# EAGLE board Everson_vin-5v-regulator (EAGLE 9.6.2)
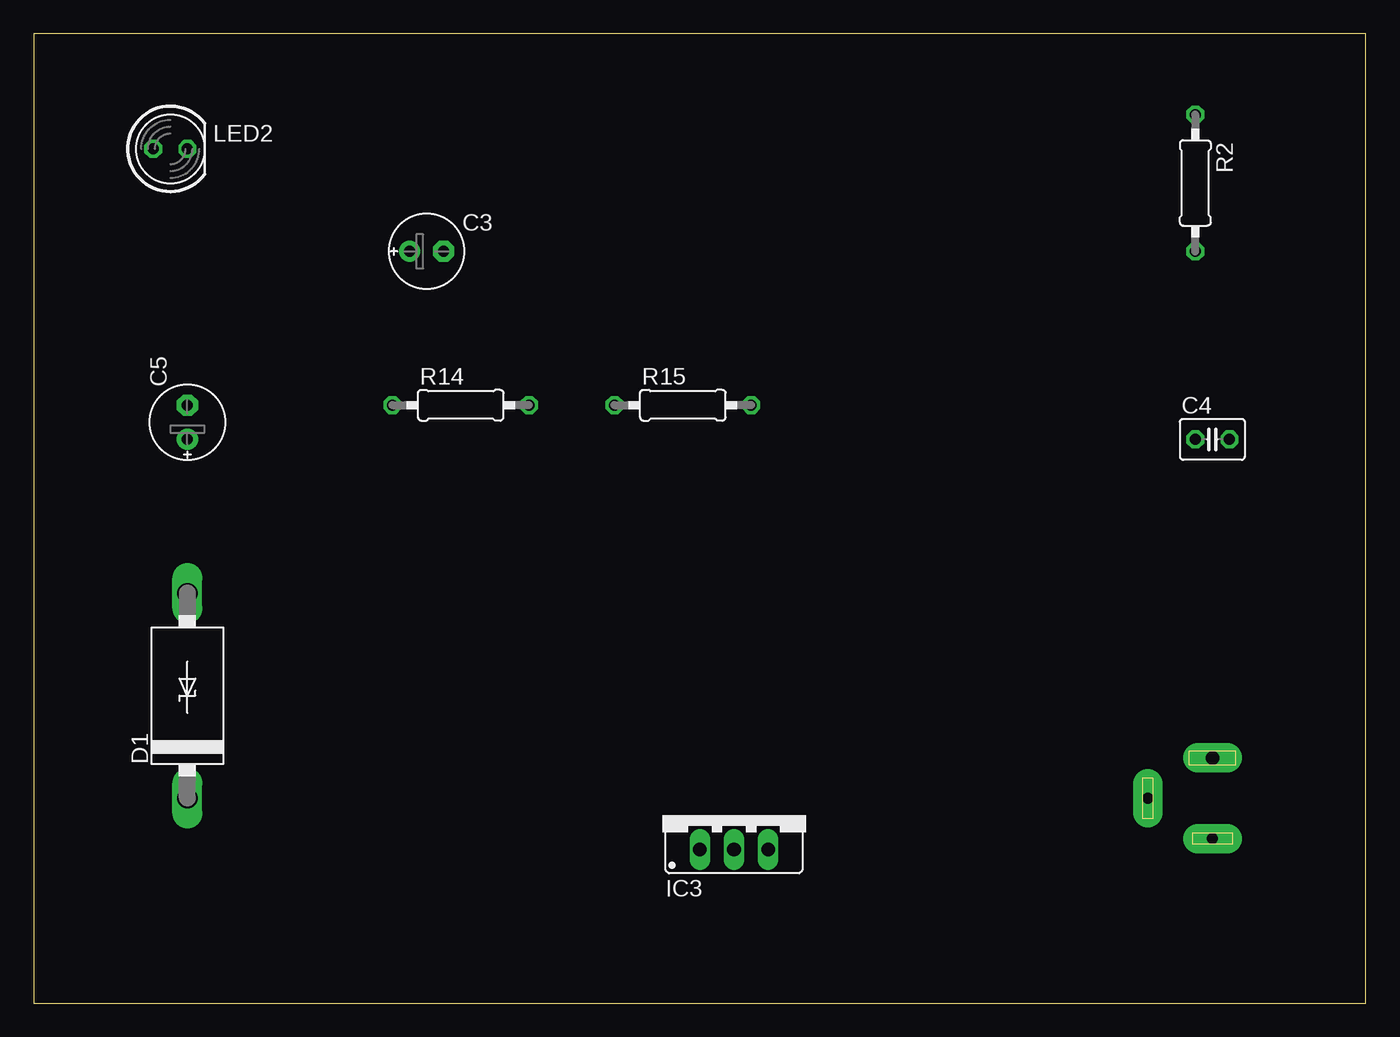
[diagram p0: board, top side]
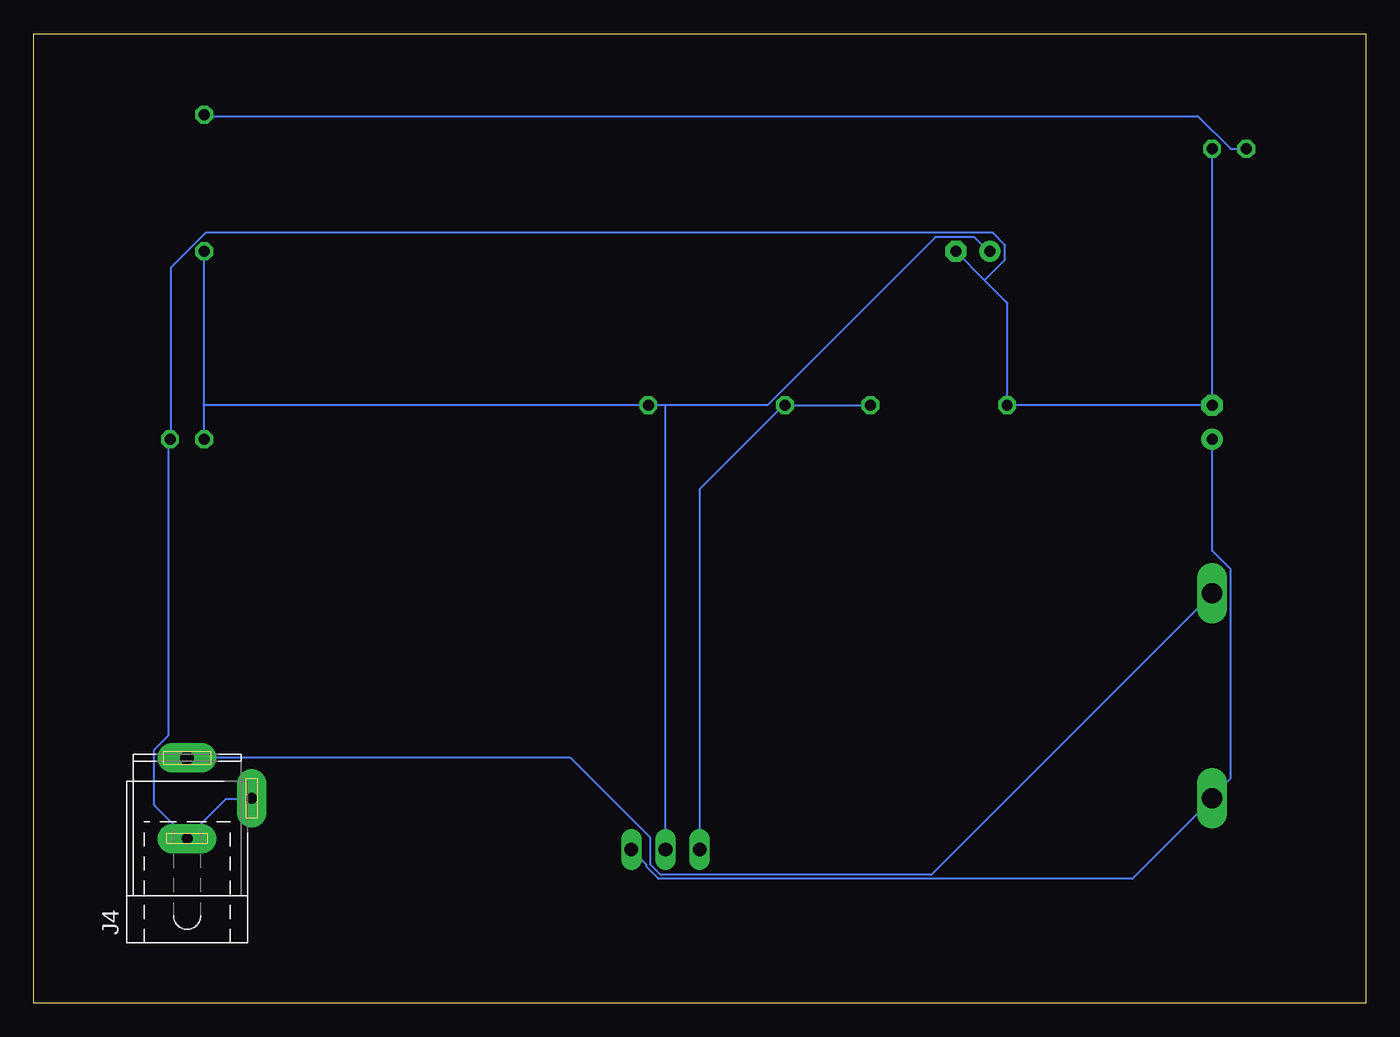
[diagram p1: board, bottom side, seen from below]

Size 99.04 x 72.06 mm. Coordinates in mm from the lower left corner, seen from the top.
Outline: 0,0 99.04,0 99.04,72.06 0,72.06 0,0
Copper layers (1*16): Top 0.035mm / dielectric 1.5mm / Bottom 0.035mm
Design rules "default": minimum track width 6mil, minimum drill 0.35mm, track to track 6mil, track to pad 6mil, pad to pad 6mil, via to via 6mil, smd to smd 6mil, copper to edge 40mil, drill to drill 6mil, minimum pad ring 10mil, minimum via ring 8mil, stop-mask expansion 4mil, vias tented up to drill 0mil, thermal gap 10mil

## Footprints (pad centres in the part's own frame; a part is rotated, then mirrored left to right if it is on the bottom)
E2,5-6E = drill 0.813 pad 1.575: + -1.27,0 | drill 0.813 pad 1.575 octagon: - 1.27,0
C025-030X050 = drill 0.813 octagon: 1 -1.27,0; 2 1.27,0
C4111-15 = drill 1.499 long: A 7.62,0; C -7.62,0
317TS = drill 1.016 long: 1 -2.54,-2.54; 2 0,-2.54; 3 2.54,-2.54
SPC4077 = drill 0.8 pad 2.184 long: 1 -3,0; 2 0,-4.8 | drill 1 pad 2.184 long: 3 3,0
LED5MM = drill 0.813 octagon: A -1.27,0; K 1.27,0
0207/10 = drill 0.813 octagon: 1 -5.08,0; 2 5.08,0

## Placement (x,y rotation side)
C3  10uF  [E2,5-6E]  29.21,55.88 0 top
C4  100nF  [C025-030X050]  87.63,41.91 0 top
C5  47uF  [E2,5-6E]  11.43,43.18 90 top
D1  1N5908  [C4111-15]  11.43,22.86 90 top
IC3  LM317  [317TS]  52.07,13.97 0 top
J4  [SPC4077]  87.63,15.24 90 bottom
LED2  VERDE  [LED5MM]  10.16,63.5 0 top
R2  1K  [0207/10]  86.36,60.96 270 top
R14  715  [0207/10]  31.75,44.45 0 top
R15  240  [0207/10]  48.26,44.45 0 top

## Library data of the parts
C3-C5 = rcl; SPICEPREFIX: C
D1 = diode
IC3 = v-reg
J4 = con-jack; OC_FARNELL: unknown; OC_NEWARK: unknown
LED2 = led
R2 R14 R15 = rcl; SPICEPREFIX: R

## Nets
+5V: C3.+ C4.1 IC3.2 R2.2 R15.2
GND: C3.- C4.2 C5.- J4.1 J4.2 LED2.K R14.1
N$1: D1.A J4.3
N$2: C5.+ D1.C IC3.3
N$3: IC3.1 R14.2 R15.1
N$4: LED2.A R2.1

## Tracks (layer width: path | path; a pad name or v marks a point on that pad's centre or on a via)
+5V
  Bottom 0.152: 86.41,44.45 86.41,55.88 R2.2 | 86.41,44.45 86.41,42.01 C4.1 | 52.12,44.45 44.5,44.45 32,56.95 29.11,56.95 28.04,55.88 C3.+ | 52.12,44.45 R15.2 86.41,44.45 | 52.12,44.45 52.12,11.53 IC3.2
GND
  Bottom 0.152: 87.63,12.29 90.07,14.73 90.07,18.85 89,19.91 89,41.86 C4.2 88.85,42.01 88.85,54.66 86.26,57.25 27.74,57.25 26.82,56.34 26.82,55.27 28.35,53.75 | 87.63,12.29 84.73,15.19 82.91,15.19 J4.2 | 87.63,12.29 J4.1 | C3.- 28.35,53.75 | 28.35,53.75 26.67,52.07 R14.1 C5.- LED2.K
N$1
  Bottom 0.152: J4.3 59.13,18.24 53.19,12.29 53.19,10.31 52.43,9.55 32.31,9.55 11.43,30.43 D1.A
N$2
  Bottom 0.152: IC3.3 53.49,10.31 53.49,10.16 52.58,9.25 17.37,9.25 11.43,15.19 D1.C 11.43,15.34 10.06,16.71 10.06,32.26 11.43,33.63 C5.+
N$3
  Bottom 0.152: R14.2 R15.1 43.28,44.45 49.53,38.2 IC3.1
N$4
  Bottom 0.152: LED2.A 10.06,63.5 12.5,65.94 86.26,65.94 R2.1